# Altium PCB smartee.PcbDoc
Units mil, origin at the board's own origin, x right, y up, seen from the top; angles counter-clockwise.
Board outline 1968.5 x 1181.1 mil, 4 copper layers (Top Layer, Power, GND, Bottom Layer), stack 30.634 mil thick; 55 components, 44 nets, 231 pads, 116 vias.
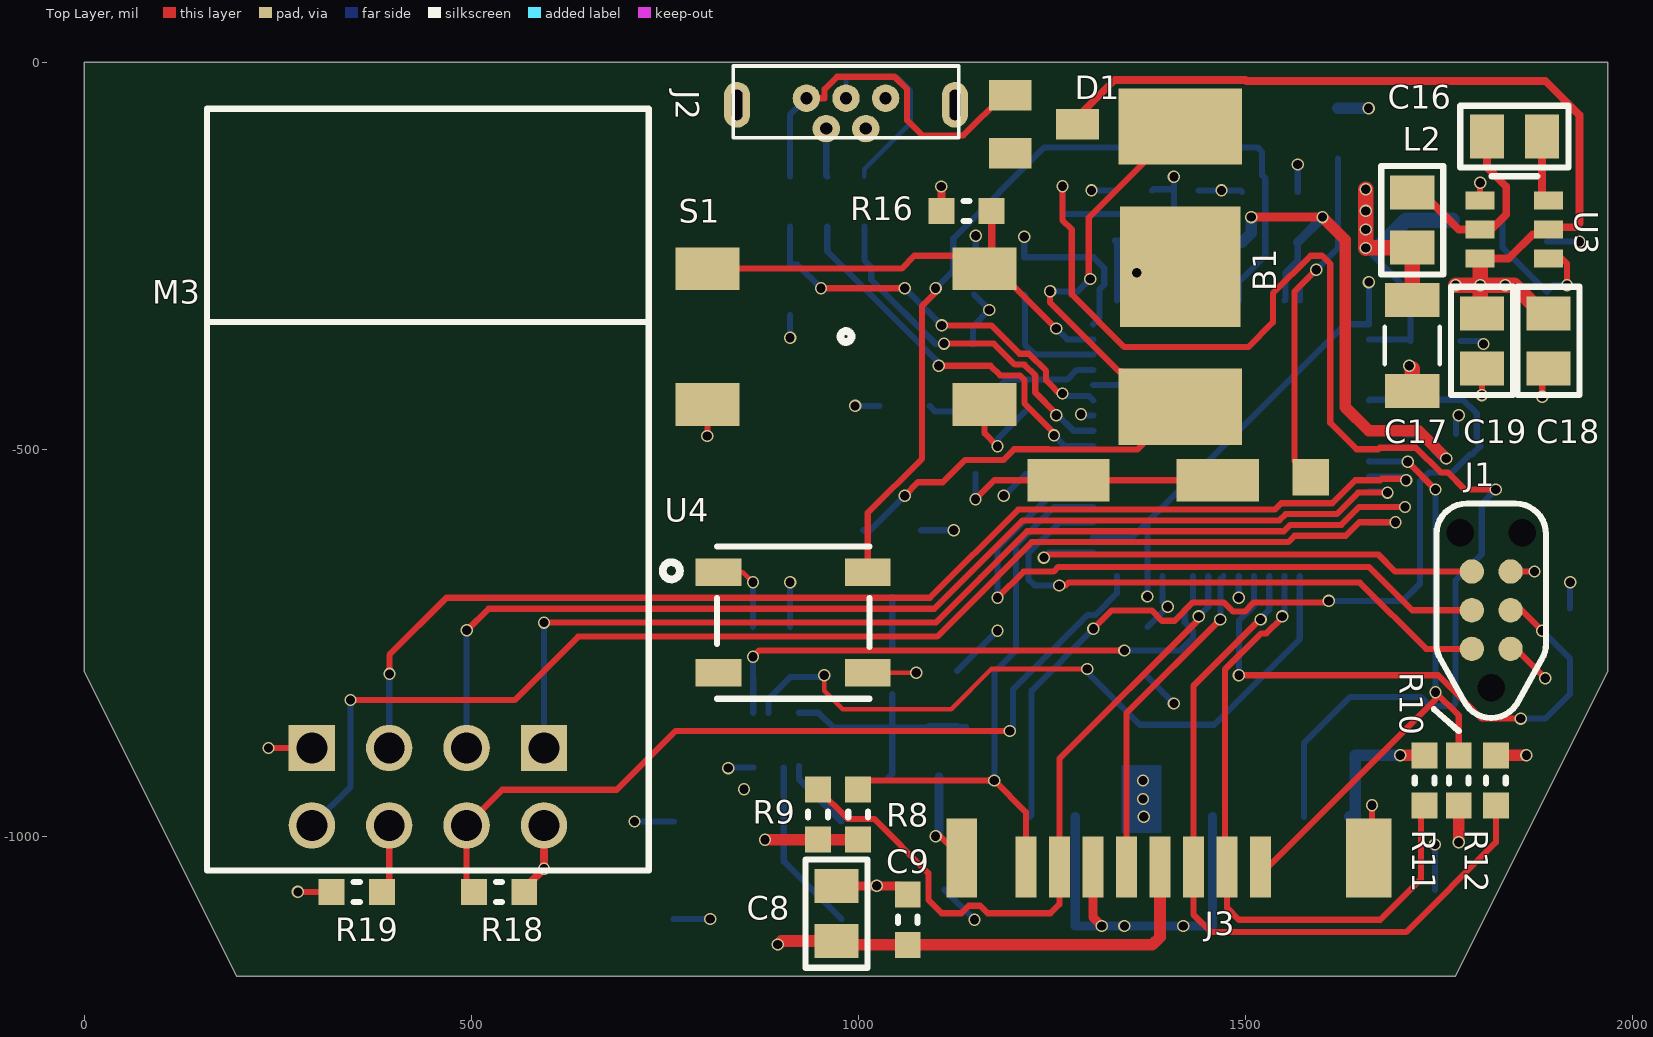
[diagram p0: Top Layer view]
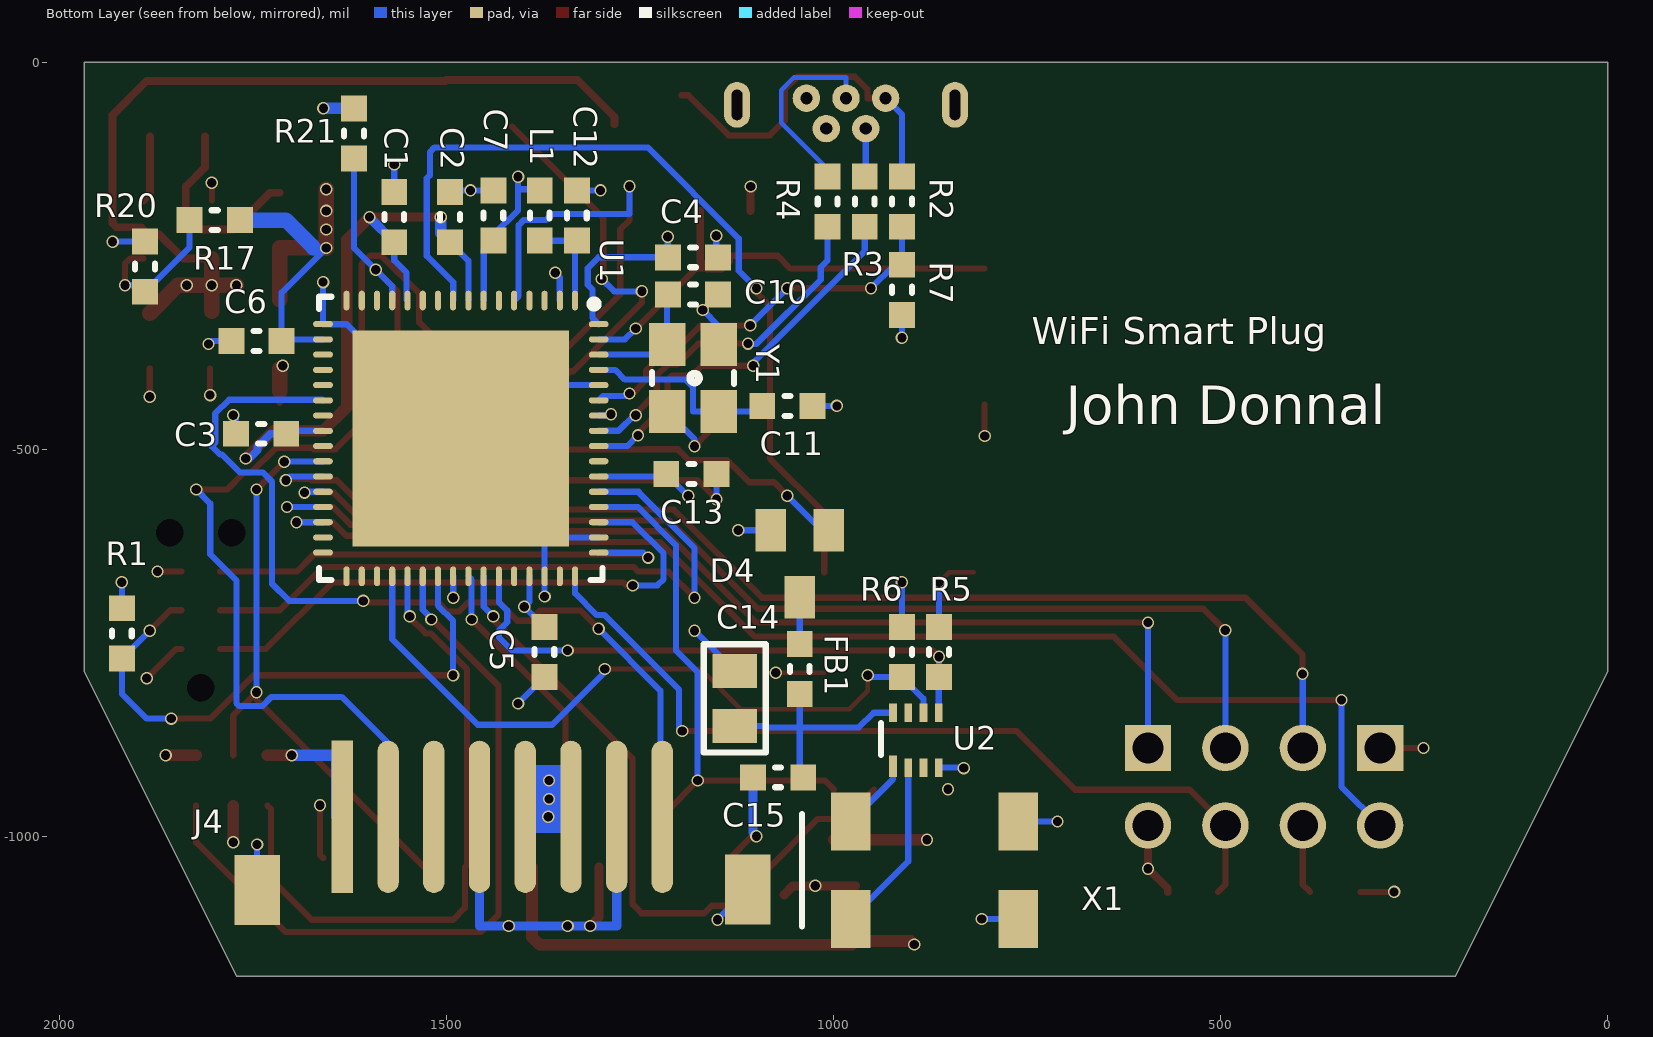
[diagram p1: Bottom Layer view, seen from below]
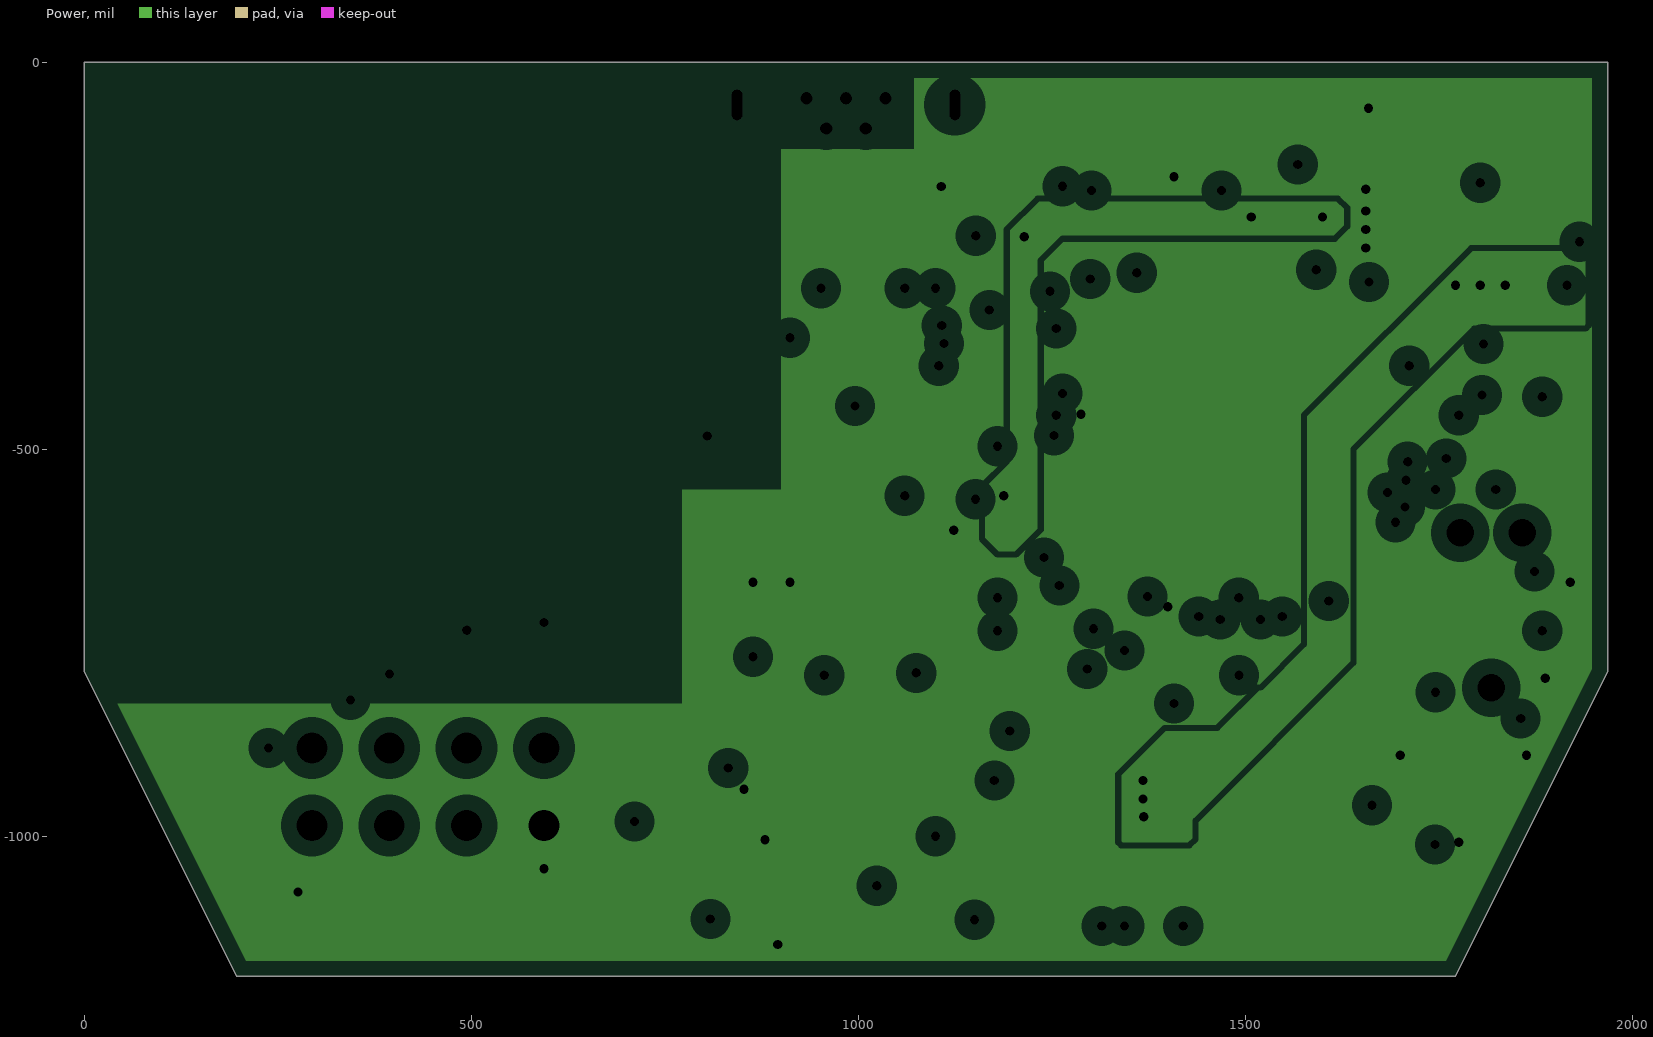
[diagram p2: Power, clearances drawn from the general rule]
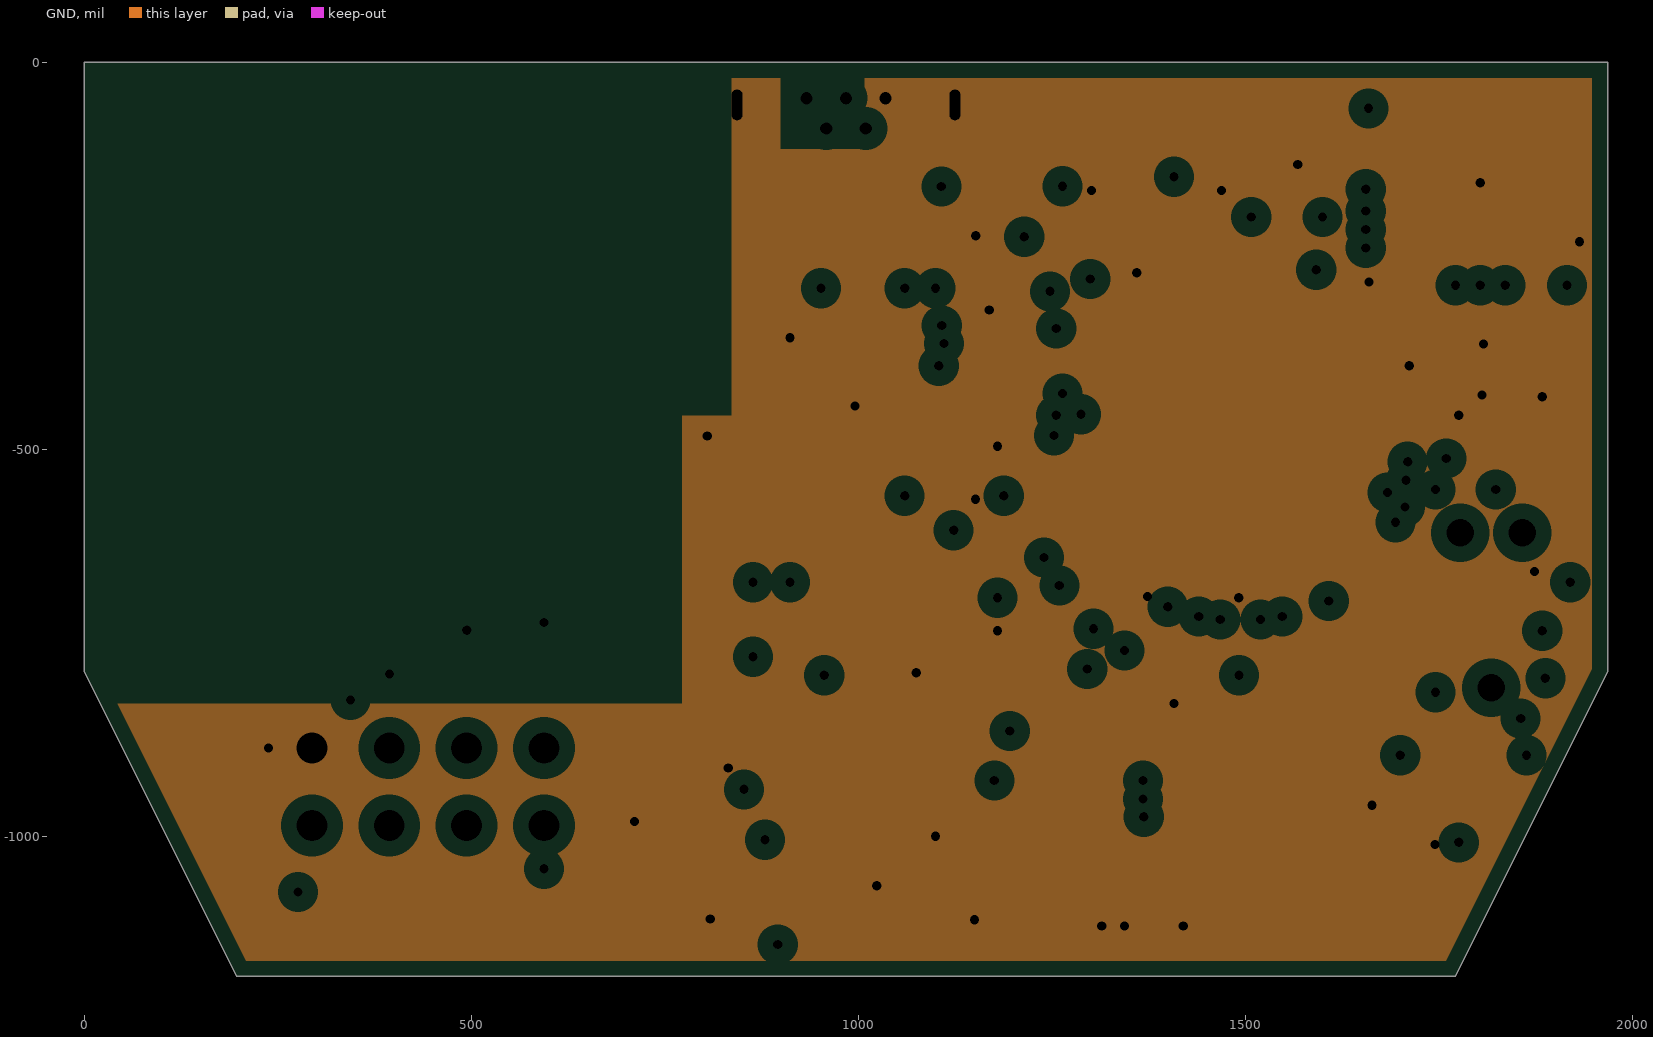
[diagram p3: GND, clearances drawn from the general rule]

## Layer stack, top to bottom
Top Solder: solder mask 0.4, Solder Resist, Dk 3.5
Top Layer: signal copper 1.4
Dielectric 1: core 10, FR-4, Dk 4.2
Power: plane copper 1.417, net (Multiple Nets)
Dielectric 3: prepreg 5, Dk 4.2
GND: plane copper 1.417, net GND
Dielectric 2: core 10, Dk 4.2
Bottom Layer: signal copper 1.4
Bottom Solder: solder mask 0.4, Solder Resist, Dk 3.5

## Board outline
196.85,-1181.1 0,-787.4 0,0 1968.5,0 1968.5,-787.4 1771.65,-1181.1

## Design rules (kind name [scope] priority, off if disabled: settings)
Clearance [All] p1: gap=6
MinimumSolderMaskSliver [All] p1: minsoldermaskwidth=2
PlaneClearance [All] p1: clearance=20
PlaneConnect [All] p1: planeconnectstyle=Direct reliefexpansion=20 reliefentries=4 reliefconductorwidth=10 reliefairgap=10
PolygonConnect [All] p1: connectstyle=Relief reliefconductorwidth=10 reliefentries=4 polygonreliefangle="90 Angle" airgapwidth=10
RoutingVias [All] p1: holewidth=12 width=16 viastyle="Through Hole" minholewidth=12 minwidth=16 maxholewidth=16 maxwidth=20
SilkToSolderMaskClearance [IsPad] p1: minsilkscreentomaskgap=6 clearancetoexposedcopper=TRUE
SolderMaskExpansion isVia [IsVia] p1: expansion=-10
SolderMaskExpansion [All] p2: expansion=2
UnpouredPolygon [All] p1: allowunpoured=FALSE
Width [All] p1: maxlimit=20 minlimit=6 preferedwidth=8 minimp=50.000000 maximp=50.000000 favimp=50.000000
25 further rules are at their usual default settings.

## Classes and differential pairs
component class wemo_board: C1 C2 C3 C4 C5 C6 C7 C8 C9 C10 C11 C12 C13 D1 J1 J2 J3 L1 R1 R2 R3 R4 R5 R6 R7 R8 R9 R10 R11 R12 R16 R21 S1 U1 U4 Y1
component class wemo_board2: B1 BAT1 C14 C15 C16 C17 C18 C19 D4 FB1 J4 L2 M3 R17 R18 R19 R20 U2 U3 X1

## Components (designator, comment, footprint, x,y, rotation, side; value= is the part's Value field where it differs from the comment)
B1 "BK-879" BK-879 1416,-264 r270 top
C1 "0.1u" 0603 1568,-200 r90 bottom
C2 "0.1u" 0603 1496,-200 r90 bottom
C3 "0.1u" 0603 1740,-480 r0 bottom
C4 "0.1u" 0603 1182,-252 r180 bottom
C5 "0.1u" 0603 1374,-762 r270 bottom
C6 "0.1u" 0603 1746,-360 r0 bottom
C7 "0.1u" 0603 1440,-198 r90 bottom
C8 "22u" 0805 972,-1100 r90 top
C9 "0.1u" 0603 1064,-1108 r90 top
C10 "CAP" 0603 1182,-300 r0 bottom
C11 "CAP" 0603 1060,-444 r0 bottom
C12 "CAP" 0603 1332,-198 r90 bottom
C13 "CAP" 0603 1184,-532 r0 bottom
C14 "22u" 0805 1128,-822 r90 bottom
C15 "0.1u" 0603 1072,-924 r0 bottom
C16 "0.1u" 0805 1848,-96 r180 top
C17 "22u" 1206 1716,-366 r270 top
C18 "10u" 0805 1892,-360 r270 top
C19 "10u" 0805 1806,-360 r270 top
D1 "BAT54C" SOT23 1240,-80 r270 top
D4 "BAT54C" SOT23 1044,-648 r0 bottom
FB1 "100 @ 100 MHz" 0603 1044,-784 r270 bottom
J1 "TC2030-MCP-NL" TC2030-MCP-NL 1818,-708 r90 top
J2 "614105150621" 614105150621 984.25,-66 r0 top
J3 "DM3CS-SF" DM3CS-SF 1390,-1040 r0 top
J4 "B8B-ZR-SM4-TF(LF)(SN)" B8B-ZR-SM4-TF 1635,-975 r0 bottom
L1 "Ferrite" 0603 1380,-198 r270 bottom
L2 "3.3u" 0805 1716,-204 r270 top
M3 "ESP8266" ESP8266 444,-936 r90 top
R1 "RES" 0603 1920,-738 r270 bottom
R2 "RES" 0603 912,-180 r90 bottom
R3 "RES" 0603 960,-180 r90 bottom
R4 "RES" 0603 1008,-180 r90 bottom
R5 "RES" 0603 864,-762 r270 bottom
R6 "RES" 0603 912,-762 r270 bottom
R7 "RES" 0603 912,-294 r90 bottom
R8 "RES" 0603 1000,-972 r270 top
R9 "RES" 0603 948,-972 r270 top
R10 "RES" 0603 1732,-928 r90 top
R11 "RES" 0603 1776,-928 r270 top
R12 "RES" 0603 1824,-928 r90 top
R16 "RES" 0603 1140,-192 r180 top
R17 "RES" 0603 1800,-204 r0 bottom
R18 "RES" 0603 536,-1072 r180 top
R19 "RES" 0603 352,-1072 r0 top
R20 "RES" 0603 1890,-264 r90 bottom
R21 "RES" 0603 1620,-92 r90 bottom
S1 "2-1437565-9" 2-1437565-9 984.25,-354.33 r270 top
U1 "SAM4S" QFN64 1482,-486 r270 bottom
U2 "ISL12057IRUZ-T" UTDFN8 894,-876 r90 bottom
U3 "TPS562209DDCT" TSOP-6 1848,-216 r0 top
U4 "28085" WS2812B 916,-724 r0 top
X1 "CPFBZ-A2C4-32.768KD6" XTAL 870,-1044 r180 bottom
Y1 "XTAL" XTAL_3.2X2.5MM 1182,-408 r270 bottom

## Footprints (in the part's own frame and the unit in brackets; to place one, negate y for a bottom-side part, rotate by r counter-clockwise, add the part's x,y. Pads: shape width x height; smd on the part's side, far side on the other; paste and mask are expansions set on the pad)
2-1437565-9 [mm] "Push Button"
  rect 1.4x2.1 smd: 1(-2.23,4.55) 2(-2.23,-4.55) 3(2.23,4.55) 4(2.23,-4.55)
  body extent -3,-5 3,5, height 4.41
0603 [mm]
  rect 0.85x0.85 smd: 1(-0.825,0) 2(0.825,0)
  silkscreen extent -0.1,-0.33 0.1,0.33, body extent -0.8,-0.4 0.8,0.4, height 0.8
0805 [mil]
  rect 44x57 smd: 1(-35.5,0) 2(35.5,0)
  silkscreen extent -70,-40 70,40, body extent -39,-25 39,25, height 49
1206 [mil]
  rect 44x71 smd: 1(-59,0) 2(59,0)
  silkscreen extent -24,-36 24,36, body extent -63,-31 63,31, height 63
614105150621 [mm] "WR-COM_USB_Micro Type AB_Vertical_THT Micro Type AB Vertical THT"
  round 0.9 hole 0.4: 1(-1.3,0.5) 2(-0.65,-0.5) 3(0,0.5) 4(0.65,-0.5) 5(1.3,0.5)
  oval 0.85x1.5 hole 0.35 slot 1 at 90 deg: Z1(-3.575,0.28) Z2(3.575,0.28)
  silkscreen extent -3.7,-0.8 3.7,1.55, body extent -3.99,-1.07 4.01,1.83, height 5.6
B8B-ZR-SM4-TF [mm]
  oval 0.7x5 smd: 1(-10.5,0) 2(-9,0) 3(-7.5,0) 4(-6,0) 5(-4.5,0) 6(-3,0) 7(-1.5,0)
  rect 0.7x5 smd: 8(0,0)
  rect 1.5x2.3 smd: S1(-13.3,2.388) S2(2.8,2.4)
  body extent -12.76,-1.21 2.24,3.99, height 5
BK-879 [mm] "Coin Cell Holder"
  rect 3.96x3.96 smd: N(0,0)
  rect 2.5x4.06 smd: P1(-4.6,0) P2(4.6,0)
  body extent -5.26,-4.04 5.41,3.84, height 2.79
DM3CS-SF [mm] "uSD Card Holder"
  rect 0.7x2 smd: 1(3.3,0) 2(2.2,0) 3(1.1,0) 4(0,0) 5(-1.1,0) 6(-2.2,0) 7(-3.3,0) 8(-4.4,0)
  rect 1x2.6 smd: 9(-6.5,0.3)
  rect 1.5x2.6 smd: 10(6.85,0.3)
  rect 2.7x1.4 smd: 11(-3,12.7) 12(1.9,12.7)
  rect 1.2x1.2 smd: 13(4.95,12.8)
  body extent -6.6,-0.79 7.2,13.31, height 1.98
ESP8266 [mil]
  rect 60x60 hole 40: 1(50,150) 4(50,-150)
  round 60 hole 40: 2(50,50) 3(50,-50) 5(-50,150) 6(-50,50) 7(-50,-50) 8(-50,-150)
  silkscreen extent -108,-285 876,285, body extent -109,-285 876,285, height 157
QFN64 [mm] "QFN, 64-Leads, Body 9.00x9.00mm, Pitch 0.50mm, Thermal Pad 7.10x7.10mm, IPC Medium Density"
  oval 0.65x0.2 smd: 1(-4.525,3.75) 2(-4.525,3.25) 3(-4.525,2.75) 4(-4.525,2.25) 5(-4.525,1.75) 6(-4.525,1.25) 7(-4.525,0.75) 8(-4.525,0.25) 9(-4.525,-0.25) 10(-4.525,-0.75) 11(-4.525,-1.25) 12(-4.525,-1.75) 13(-4.525,-2.25) 14(-4.525,-2.75) 15(-4.525,-3.25) 16(-4.525,-3.75) 33(4.525,-3.75) 34(4.525,-3.25) 35(4.525,-2.75) 36(4.525,-2.25) 37(4.525,-1.75) 38(4.525,-1.25) 39(4.525,-0.75) 40(4.525,-0.25) 41(4.525,0.25) 42(4.525,0.75) 43(4.525,1.25) 44(4.525,1.75) 45(4.525,2.25) 46(4.525,2.75) 47(4.525,3.25) 48(4.525,3.75)
  oval 0.2x0.65 smd: 17(-3.75,-4.525) 18(-3.25,-4.525) 19(-2.75,-4.525) 20(-2.25,-4.525) 21(-1.75,-4.525) 22(-1.25,-4.525) 23(-0.75,-4.525) 24(-0.25,-4.525) 25(0.25,-4.525) 26(0.75,-4.525) 27(1.25,-4.525) 28(1.75,-4.525) 29(2.25,-4.525) 30(2.75,-4.525) 31(3.25,-4.525) 32(3.75,-4.525) 49(3.75,4.525) 50(3.25,4.525) 51(2.75,4.525) 52(2.25,4.525) 53(1.75,4.525) 54(1.25,4.525) 55(0.75,4.525) 56(0.25,4.525) 57(-0.25,4.525) 58(-0.75,4.525) 59(-1.25,4.525) 60(-1.75,4.525) 61(-2.25,4.525) 62(-2.75,4.525) 63(-3.25,4.525) 64(-3.75,4.525)
  rect 7.1x7.1 smd: 65(0,0)
  silkscreen extent -4.65,-4.65 4.65,4.65, body extent -4.5,-4.5 4.5,4.5, height 0.9
SOT23 [mm] "SOT23"
  rect 1x1.4 smd: 1(-0.95,-1.1) 2(0.95,-1.1) 3(0,1.1)
  body extent -1.46,-0.65 1.46,0.65, height 1.2
TC2030-MCP-NL [mm] "Conector ICD en placa"
  round 0.8 smd paste-0.4: 1(-1.27,-0.635) 2(-1.27,0.635) 3(0,-0.635) 4(0,0.635) 5(1.27,-0.635) 6(1.27,0.635)
  round 0.85 hole 0.9 unplated mask+0: ""(-2.54,0) ""(2.54,-1.016) ""(2.54,1.016)
  silkscreen extent -3.54,-1.8 3.5,1.8, body extent -3.55,-1.81 3.51,1.81
TSOP-6 [mm]
  rect 0.95x0.6 smd: 1(-1.125,0.95) 2(-1.125,0) 3(-1.125,-0.95) 4(1.125,-0.95) 5(1.125,0) 6(1.125,0.95)
  silkscreen extent -0.75,1.75 0.75,1.75, body extent -1.42,-1.5 1.45,1.47, height 0.87
UTDFN8 [mm]
  rect 0.7x0.25 smd: 1(-0.85,0.75)
  rect 0.6x0.25 smd: 2(-0.9,0.25) 3(-0.9,-0.25) 4(-0.9,-0.75) 5(0.9,-0.75) 6(0.9,-0.25) 7(0.9,0.25) 8(0.9,0.75)
  silkscreen extent -0.48,1.14 0.56,1.14, body extent -1,-1 1,1, height 0.55
WS2812B [mm]
  rect 1.5x0.9 smd: 1(-2.45,1.65) 2(-2.45,-1.65) 3(2.45,-1.65) 4(2.45,1.65)
  silkscreen extent -4.28,-2.5 2.5,2.5, body extent -2.5,-2.5 2.5,2.5, height 2.6
XTAL [mm] "32.768kHz"
  rect 1.3x1.9 smd: 1(-2.75,-1.6) 2(2.75,-1.6) 3(2.75,1.6) 4(-2.75,1.6)
  silkscreen extent -4.35,-1.85 -4.35,1.85, body extent -4.35,-1.85 4.35,1.85, height 2.5
XTAL_3.2X2.5MM [mm]
  rect 1.4x1.2 smd: 1(-1.1,-0.85) 2(1.1,-0.85) 3(1.1,0.85) 4(-1.1,0.85)
  silkscreen extent -0.2,-1.35 0.2,1.35

## Part data
B1: "HOLDER 6.8MM COIN CELL SMD"
C1 C2 C3 C4 C5 C6 C7 C9 C15: library part CC0603ZRY5V9BB104, "CAP CER 0.1UF 50V Y5V 0603"
C8 C14: library part CL21A226MAQNNNE, "CAP CER 22UF 25V 20% X5R 0805"
C10 C11 C12 C13: "Capacitor"
C16: library part 08053C104KAT2A, "CAP CER 0.1UF 25V 10% X7R 0805"
C17: library part C3216X5R0J226K/1.6, "CAP CER 22UF 6.3V 10% X5R 1206"
C18 C19: library part C0805C106K8PACTU, "CAP CER 10UF 10V 10% X5R 0805"
D1 D4: "DIODE SCHOTTKY 30V 200MA SOT23"
FB1: library part MPZ1608S101ATAH0, "FERRITE CHIP 100 OHM 3A 0603"
J1: "Tag Connect"
J2: "CONN RCPT USB TYPE AB"
J3: "CONN MICRO SD R/A HING TYPE SMD"
J4: "CONN HEADER ZH TOP 8POS 1.5MM"
L1: "Ferrite bead"
L2: library part MLP2012S3R3MT0S1, "FIXED IND 3.3UH 900MA 190 MOHM"
M3: "WiFi UART module"
R1 R2 R3 R4 R5 R6 R7 R8 R9 R10 R11 R12 R16 R17 R18 R19 R20 R21: "Resistor"
S1: "SWITCH TACTILE SPST-NO 0.05A 12V"
U1: "Atmel SAM4S microcontroller, 64 pin"
U2: "IC RTC CLK/CALENDAR I2C 8-UTDFN"
U3: "IC REG BUCK SYNC ADJ 2A SOT-23-6"
U4: "WS2812 LED MODULE"
X1: "CRYSTAL 32.768KHZ 6PF SMD"
Y1: "Crystal Oscillator"

## Via types
v1: diameter 16, hole 12, Top Layer to Bottom Layer, 116 vias

## Nets (pads, with @x,y where several pads share a name; then routed paths per layer and width w, separated by ;. In a path a pad name is that pad's centre, name@x,y a point inside that pad or via, vN(x,y) a via of type N, cw(c..) or ccw(c..) an arc to the next point about the centre after c; other vN are vias at no path point)
+1V2: C1.1 C2.1 C3.1 C4.1 C13.2 U1.8 U1.12 U1.24 U1.54 U1.64 | length 1222.9
  Top Layer w8: v1@1503.95,-199.95 1504,-200 v1(1508,-200) ; v1(1600,-200) v1(1600,-200)
  Top Layer w12: v1(1508,-200) v1(1600,-200)
  Top Layer w15: v1(1600,-200) 1629.5,-229.5 1629.5,-445.5 1660,-476 1724,-476 v1(1760,-512)
  Bottom Layer w8: v1(1188,-560) 1188.48,-560 C13.2 1219.69,-535.21 U1.54 ; v1(1214.48,-225.52) C4.1 1304,-252 1318,-266 1318,-287.46 1312,-293.46 1312,-330.21 U1.64 ; U1.8 1472.16,-256.32 C2.1 ; U1.12 1552,-306.75 1552,-272 1568,-256 C1.1 ; v1@1600,-200.48 v1(1600,-200) ; U1.24 C3.1@1703.68,-476.16
  Bottom Layer w10: C3.1@1703.68,-476.16 C3.1 1728,-480 1744.75,-496.75 1744.75,-501.29 1755.46,-512 v1(1760,-512)
  Bottom Layer w12: C1.1 v1@1600,-200.48
  Bottom Layer w15: C2.1 1508,-220.48 v1(1508,-200)
+3V3: C5.1 C6.1 C7.1 C8.1 C9.1 C17.1 D4.2 J1.1 J3.4 J4.8 L1.1 L2.2 M3.8 R1.1 R5.1 R6.1 R8.2 R9.2 R10.2 R11.2 R12.2 R16.2 R17.1 R18.1 R19.1 R21.2 U1.7 U1.18 U1.45 U1.58 U4.1 | length 2311.4
  Top Layer w6: U4.1 851.04,-659.04 v1(864,-672)
  Top Layer w8: v1(276,-1072) R19.1 ; J1.1 1850,-758 v1(1888,-796)
  Top Layer w10: R18.1 568.48,-1067.52 v1(594,-1042) M3.8 ; R16.2 v1(1107.52,-160.48) ; 1390,-1130.48 1391.52,-1132
  Top Layer w15: v1(879.52,-1004.48) R9.2 R8.2 ; v1(896,-1140) 900.5,-1135.5 C8.1 976.98,-1140.48 C9.1 1380,-1140.48 1390,-1130.48 J3.4 ; v1(1700.48,-895.52) R10.2 ; v1(1776,-1008) R11.2 ; R12.2 v1(1863.52,-895.52)
  Top Layer w20: v1(1656,-240) v1@1656,-239.5 ; v1(1656,-164) v1(1656,-216) v1@1656,-239.5 ; C17.1 L2.2 v1@1656,-239.5
  Bottom Layer w8: R5.1 v1(864,-672) ; R6.1 v1(912,-672) ; D4.2 v1(1123.31,-604.69) ; v1(1287.91,-454.72) 1286.22,-454.72 1284.47,-456.47 U1.58 ; C5.1 v1(1400,-703.52) 1393.42,-696.94 U1.45 ; L1.1 1381.52,-164 1408,-164 ; v1(1408,-148) 1408,-164 ; U1.7 1452.47,-242.95 C7.1 1440,-223.07 1408,-191.07 1408,-164 ; v1(1656,-240) 1713.52,-297.52 C6.1 1711.57,-358.05 U1.18 ; R1.1 v1(1920,-672)
  Bottom Layer w15: R21.2 v1(1659.52,-59.52) ; J4.8 1642.5,-975 1642.5,-895.52 v1(1700.48,-895.52)
  Bottom Layer w20: 1672.5,-239.5 1708,-204 R17.1
  other v1: 852.48,-939.52 1656,-192
+5V: C18.1 C19.1 D1.3 J4.3 J4.4 U3.3 U3.5 | length 1183
  Top Layer w10: D1.3 1283.31,-70.9 1331.52,-22.68 1500.48,-22.68 1501.79,-24 1888,-24 1932,-68 1932,-208 1927,-213 1895.29,-213 U3.5 1886.29,-222 1871.97,-222 1840.57,-253.4 U3.3 U3.3@1804,-253.69 ; C19.1@1804,-321.92 1803.71,-322.21 C19.1
  Top Layer w20: v1(1772,-288) v1(1804,-288) ; C19.1@1804,-321.92 v1(1804,-288) ; U3.3@1804,-253.69 v1(1804,-288) ; C18.1@1884,-324.5 1847.5,-288 v1(1836,-288) v1(1804,-288)
  other v1: 1369,-975 1368,-952 1368,-928
BTN: R16.1 S1.1 S1.2 U1.63 | length 634.8
  Top Layer w8: S1.2 1056.01,-266.54 1072.54,-250 1134,-250 1134,-256.98 1144.54,-267.52 1159.46,-267.52 1161.91,-265.06 S1.1 1178.54,-266.54 v1(1256,-344)
  Top Layer w10: S1.1 1172.48,-257.44 R16.1
  Bottom Layer w8: v1(1256,-344) 1270.05,-358.05 U1.63
CD: J3.13 R21.1 U1.13 | length 492.2
  Top Layer w8: J3.13 1564,-515.18 1564,-296 v1(1592,-268)
  Bottom Layer w8: U1.13 1570.58,-289.42 v1(1592,-268) 1620,-240 R21.1
GND: B1.N C1.2 C2.2 C3.2 C4.2 C5.2 C6.2 C7.2 C8.2 C9.2 C10.1 C11.1 C12.2 C13.1 C14.2 C15.2 C17.2 C18.2 C19.2 J1.5 J2.5 J2.Z1 J2.Z2 J3.6 J3.9 J3.10 J3.11 J3.12 J4.2 J4.5 J4.S1 J4.S2 M3.1 R7.1 R20.2 S1.3 S1.4 U1.2 U1.17 U1.40 U1.46 U1.50 U1.60 U1.65 U2.4 U3.1 U4.3 X1.2 X1.3 Y1.2 Y1.4 | length 3293.2
  Top Layer w6: U4.3 v1(1075.04,-788.96)
  Top Layer w8: v1(238,-886) M3.1 ; v1(805.12,-482.88) S1.4 ; v1(1100,-1000) 1105.91,-1000 J3.9 ; v1(1151.52,-564.48) 1176,-540 J3.11 J3.12 ; S1.3 1163.39,-479.39 v1(1180,-496) ; J3.10 1664,-1023.88 v1(1664,-960) ; v1(1712,-392) v1@1716,-396 ; C17.2@1716,-440 C17.2 ; U3.1 v1(1803.71,-155.71) ; v1(1806,-430) C19.2 ; J1.5 v1(1874,-658) ; v1(1884,-432) C18.2@1884,-395.5
  Top Layer w12: C8.2 1052.98,-1064.5 C9.2 ; J3.6 1303.39,-1104.61 v1(1314.77,-1116)
  Top Layer w20: C17.2 v1@1716,-396
  Bottom Layer w8: v1(710.99,-981.01) X1.3 ; X1.2 v1(809.01,-1106.99) ; v1(832,-912) 832.57,-911.43 U2.4 ; v1(912,-356) R7.1 ; v1(996,-444) C11.1 ; J4.S1 v1(1150.38,-1108) ; C14.2 v1(1180,-734.5) ; Y1.4 1148.54,-340.98 v1(1169.52,-320) C10.1 ; C4.2 1152,-249.52 v1(1152,-224) ; v1(1151.52,-564.48) C13.1 ; v1(1180,-496) 1180,-486.77 Y1.2 ; v1(1301.52,-165.52) C12.2 ; U1.50 1354.05,-613.95 U1.65@1373.73,-594.27 ; U1.60 1413.1,-417.1 U1.65 ; U1.2 1354.05,-277.95 v1(1360,-272) ; v1(1373.73,-690.27) U1.46 U1.65@1373.73,-594.27 ; C5.2 v1(1408,-828.48) ; C7.2 v1(1469.52,-165.52) 1494,-165.52 C2.2 ; v1(1491.84,-691.84) U1.40 ; C1.2 v1(1568,-132) ; v1(1660,-284) 1660.15,-284.15 U1.17 1629.64,-338.36 U1.65 ; J4.S2 v1(1745.24,-1010.76) ; C3.2 1772.48,-459.52 v1(1776,-456) ; C6.2 1804,-360 v1(1808,-364) ; R20.2 1931.52,-231.52 v1(1932,-232) ; U1.65@1373.73,-594.27 U1.65
  Bottom Layer w12: v1(1100,-1000) 1104.48,-995.52 C15.2 ; J4.2 1280.67,-1116 v1(1314.77,-1116) 1457.84,-1116 J4.5
  other v1: 1344,-1116 1420,-1116 1024,-1064
LED_DATA: U1.9 U4.4 | length 1135.1
  Top Layer w8: U4.4 1012.46,-582.09 1082.48,-512.06 1082.48,-314.77 1100,-297.25 v1(1100,-292)
  Bottom Layer w8: v1(1100,-292) 1122.79,-269.21 1122.79,-227.76 1240.54,-110 1516,-110 1522,-116 1522,-145.91 1526,-149.91 1526,-250.09 1491.84,-284.24 U1.9
MCCDA: J3.3 R12.1 U1.38 | length 974.1
  Top Layer w8: v1(1520,-720) 1518.75,-720 1433.31,-805.44 J3.3 1433.31,-1101.31 1456,-1124 1708,-1124 1824,-1008 R12.1
  Bottom Layer w8: v1(1520,-720) 1520,-718.54 1531.21,-707.33 U1.38
MCCK: J3.5 U1.41 | length 427.8
  Top Layer w8: J3.5 1346.69,-841.31 v1(1468,-720)
  Bottom Layer w8: v1(1468,-720) 1468,-668.31 U1.41
MCDA0: J3.7 R9.1 U1.42 | length 914.8
  Top Layer w8: R9.1 986.23,-977.75 1020.87,-977.75 1090.73,-1047.61 1090.73,-1082.25 1108,-1099.52 1133.4,-1099.52 1142.92,-1090 1157.83,-1090 1167.35,-1099.52 1248.48,-1099.52 1260.08,-1087.92 J3.7 1260.08,-899.92 1440,-720 v1(1440,-716)
  Bottom Layer w8: v1(1440,-716) 1452.47,-703.53 U1.42
MCDA1: J3.8 R8.1 U1.52 | length 745.6
  Top Layer w8: R8.1 1011.52,-928 v1(1176,-928) 1216.77,-968.77 J3.8
  Bottom Layer w8: v1(1176,-928) 1176,-788 1204,-760 1204,-624 1253.42,-574.58 U1.52
MCDA2: J3.1 R11.1 U1.26 | length 782.2
  Top Layer w8: J3.1 1529.46,-1040 1746,-823.46 v1(1746,-813.92) 1776,-843.92 R11.1 ; v1(1710,-516) v1(1746,-552)
  Bottom Layer w8: U1.26 1660.62,-516 v1(1710,-516) ; v1(1746,-813.92) v1(1746,-552)
MCDA3: J3.2 R10.1 U1.37 | length 841.2
  Top Layer w8: v1(1548,-716) 1548,-717.46 1527.46,-738 1520.54,-738 1474,-784.54 1474,-1037.39 J3.2 1476.61,-1092.61 1492,-1108 1674.73,-1108 1727.24,-1055.49 1727.24,-965.24 R10.1
  Bottom Layer w8: v1(1548,-716) 1550.9,-713.1 U1.37
NetB1_P1: B1.P1 B1.P2 D4.1 | length 1010.6
  Top Layer w8: v1(1060,-560) 1077.27,-542.73 1109.21,-542.73 1137.94,-514 1187.46,-514 1201.46,-500 1245.5,-500 1245.63,-500.13 1360.97,-500.13 B1.P2@1401.1,-460 ; v1(1248,-296) 1248,-310.54 1336.73,-399.27 1340.37,-399.27 B1.P2@1401.1,-460 ; v1(1300,-280) 1298,-278 1298,-200.9 B1.P1 ; B1.P2 B1.P2@1401.1,-460
  Bottom Layer w8: D4.1 1015.31,-604.69 v1(1060,-560) ; v1(1248,-296) 1284,-296 v1(1300,-280)
NetC12_1: C12.1 L1.2 U1.1 | length 126.3
  Bottom Layer w8: U1.1 1334.36,-232.84 C12.1 L1.2
NetC14_1: C14.1 C15.1 FB1.2 U2.8 | length 339.5
  Bottom Layer w8: U2.8 948.57,-840.57 967.5,-859.5 1044,-859.5 ; C15.1 1044,-919.52 1044,-859.5 ; FB1.2 1044,-859.5 ; C14.1@1122,-859 C14.1@1139,-859 ; C14.1 1091.5,-857.5 1089.5,-859.5 1044,-859.5
NetC16_1: C16.1 U3.6 | length 86.2
  Top Layer w10: C16.1 1883.5,-169.81 U3.6
NetC16_2: C16.2 L2.1 U3.2 | length 260.1
  Top Layer w10: L2.1 1728.5,-168.5 1776,-216 U3.2 1818.03,-216 1837.41,-196.62 1837.41,-160.57 1812.5,-135.66 C16.2
NetD1_1: D1.1 J2.1 R2.2 | length 468.3
  Top Layer w8: J2.1 956.54,-46.31 956.54,-34.83 972.77,-18.6 1046.91,-18.6 1063.15,-34.83 1063.15,-75.15 1082.5,-94.5 1136.07,-94.5 1187.98,-42.6 D1.1
  Bottom Layer w8: R2.2 912,-67.39 J2.1
NetD4_3: D4.3 FB1.1 | length 66.2
  Bottom Layer w8: FB1.1@1044,-757.5 D4.3
NetJ2_2: J2.2 R3.2 | length 62.4
  Bottom Layer w8: J2.2 958.66,-146.18 R3.2
NetJ2_3: J2.3 R4.2 | length 253.6
  Bottom Layer w6: J2.3 984.25,-19.6 1051.6,-19.6 1068,-36 1068,-78 1008,-138 R4.2
NetJ4_1: J4.1 U1.22 | length 1168
  Top Layer w8: v1(1304,-732) 1327.73,-708.27 1379.29,-708.27 1392.54,-721.52 1409.02,-721.52 1432.54,-698 1472.54,-698 1484.39,-709.84 1499.3,-709.84 1511.14,-698 1610,-698 v1(1608,-696)
  Bottom Layer w8: J4.1 1224,-972.62 1224,-812 v1(1304,-732) ; v1(1608,-696) 1704,-696 1726,-674 1726,-542 1738,-530 1767.46,-530 1790.72,-506.73 1793.35,-506.73 1804,-496.09 1799.21,-491.3 1799.21,-453.76 1781.46,-436 1660.94,-436 U1.22
NetJ4_7: J4.7 U1.5 | length 1944.3
  Top Layer w8: v1(1264,-160) 1264,-204 1276,-216 1276,-300 1344,-368 1504,-368 1536,-336 1536,-298.54 1584.54,-250 1599.46,-250 1610,-260.54 1610,-466 1644,-500 1672,-500 1674,-498 1720.54,-498 1752.54,-530 1762,-530 1784,-552 v1(1824,-552)
  Bottom Layer w8: v1(1264,-160) 1264,-196 1364,-196 1371.75,-203.75 1400.87,-203.75 1407.35,-210.23 1407.35,-302.1 U1.5 ; J4.7 1575.95,-880.05 1636,-820 1726.62,-820 1738.54,-831.92 1768.08,-831.92 1772,-828 1772,-669.43 1805.72,-635.72 1805.72,-570.28 v1(1824,-552)
NetM3_2: M3.2 U1.27 | length 1582.5
  Top Layer w8: v1(394.3,-790.3) 394.3,-765.7 468,-692 1092.6,-692 1206.6,-578 1538.29,-578 1546.6,-569.69 1612.65,-569.69 1642.33,-540 1674.54,-540 1676.54,-538 1706,-538 v1(1708,-540)
  Bottom Layer w8: M3.2 v1@394,-790 ; v1(394.3,-790.3) v1@394,-790 ; v1@396,-788 v1@394,-790 ; U1.27 1703.21,-535.21 v1(1708,-540)
NetM3_3: M3.3 U1.28 | length 1442.7
  Top Layer w8: v1@494.2,-734.2 522.4,-706 1098.4,-706 1212.4,-592 1544.09,-592 1552.4,-583.69 1618.45,-583.69 1646.13,-556 v1(1684,-556)
  Bottom Layer w8: M3.3 v1(494,-734) v1@496,-732 ; U1.28 1682.9,-554.9 v1(1684,-556)
NetM3_4: M3.4 U1.29 | length 1382.9
  Top Layer w8: v1(594,-724) 1100.2,-724 1158.1,-666.1 1218.2,-606 1549.89,-606 1558.2,-597.69 1624.24,-597.69 1647.35,-574.58 v1(1706.58,-574.58)
  Bottom Layer w8: M3.4 v1(594,-724) ; U1.29 v1(1706.58,-574.58)
NetM3_5: M3.5 U1.30 | length 1662.3
  Top Layer w8: v1(344,-824) 432.2,-824 432.3,-824.1 555.9,-824.1 638,-742 1102,-742 1224,-620 1555.69,-620 1564,-611.69 1630.04,-611.69 1647.46,-594.27 v1(1694.27,-594.27)
  Bottom Layer w8: M3.5 344,-936 v1(344,-824) ; U1.30 v1(1694.27,-594.27)
NetM3_6: M3.6 R19.2 | length 89.9
  Top Layer w8: R19.2 394,-1062.48 M3.6
NetM3_7: M3.7 R18.2 U1.48 | length 1107.9
  Top Layer w8: R18.2 494,-1062.48 M3.7 540,-940 688,-940 764,-864 v1(1196,-864)
  Bottom Layer w8: v1(1196,-864) 1200,-864 1200,-810.54 1296.54,-714 1306.72,-714 1334.36,-686.36 U1.48
NetR5_2: R5.2 U1.43 U2.5 | length 739.8
  Top Layer w8: v1(864,-768) 872,-760 1240,-760 v1(1344,-760)
  Bottom Layer w8: v1(864,-768) R5.2 864.47,-794.95 U2.5 ; v1(1344,-760) 1416,-760 1432.79,-743.21 1432.79,-734.24 1422,-723.46 1422,-708.54 1432.79,-697.76 U1.43
NetR6_2: R6.2 U1.36 U2.6 | length 927.9
  Top Layer w6: v1(956,-792) 956,-812 980,-836 1120,-836 1172,-784 v1(1296,-784)
  Bottom Layer w8: U2.6 884.16,-822.32 R6.2 953.52,-794.48 v1(956,-792) ; v1(1296,-784) 1296,-788 1364,-856 1460,-856 1570.58,-745.42 U1.36
NetR17_2: R17.2 R20.1 U3.4 | length 200.3
  Top Layer w8: U3.4 1909.4,-253.4 1916,-260 v1(1916,-288)
  Bottom Layer w8: R17.2 1832.48,-238.96 R20.1 1898.48,-288 v1(1916,-288)
NetU2_1: U2.1 X1.4 | length 94.2
  Bottom Layer w8: U2.1 923.53,-926.27 X1.4
NetU2_2: U2.2 X1.1 | length 226.4
  Bottom Layer w8: U2.2 903.84,-1032.57 X1.1
NRST: J1.3 R1.2 U1.39 | length 748.8
  Top Layer w8: v1(1492,-792) 1749.53,-792 1805.53,-848 v1(1856,-848) ; J1.3 1857.52,-708 v1(1884,-734.48)
  Bottom Layer w8: v1(1492,-792) 1492,-721.46 1511.53,-701.93 U1.39 ; v1(1856,-848) 1888,-848 1920,-816 R1.2 v1(1884,-734.48)
SWCLK: J1.4 U1.53 | length 871.5
  Top Layer w8: v1(1180,-692) 1214,-658 1252.54,-658 1258.54,-652 1660,-652 1716,-708 J1.4
  Bottom Layer w8: v1(1180,-692) 1180,-628 1252.11,-555.89 1252.11,-554.9 U1.53
SWDIO: J1.2 U1.51 | length 739.4
  Top Layer w8: 1268,-676 1271.73,-672.27 1648.27,-672.27 1734,-758 J1.2
  Bottom Layer w8: v1(1260,-676) 1228,-676 1220,-668 1220,-634.54 1260.28,-594.27 U1.51
SWO: J1.6 U1.49 | length 658.3
  Top Layer w8: v1(1240,-640) 1244,-636 1300,-636 ; 1272,-636 1300,-636 ; J1.6 1694,-658 1672,-636 1300,-636
  Bottom Layer w8: v1(1240,-640) 1246.36,-633.64 U1.49
USB+: R4.1 U1.57 | length 454.5
  Top Layer w8: v1(1110.91,-363.46) 1175.46,-363.46 1202.57,-390.57 1214.67,-390.57 1228.72,-404.63 1228.72,-426.65 1256,-453.93 v1(1256,-456)
  Bottom Layer w8: R4.1 1008,-256 1017,-265 1017,-281 1100,-364 1110.37,-364 v1(1110.91,-363.46) ; v1(1256,-456) 1258.07,-456 1278.23,-476.16 U1.57
USB-: R3.1 U1.56 | length 502.8
  Top Layer w8: v1(1104,-392) 1170.91,-392 1183.48,-404.57 1208.87,-404.57 1214.72,-410.42 1214.72,-440.85 v1@1256,-482.13
  Bottom Layer w8: R3.1 960,-244 1010,-294 1104,-388 v1(1104,-392) ; v1(1253.09,-482.13) 1266.8,-495.84 U1.56
VBUS: R2.1 R7.2 U1.59 | length 526.1
  Top Layer w8: v1(952,-292) v1(1060,-292) ; v1(1108,-340) 1172,-340 1208.57,-376.57 1220.46,-376.57 1242.72,-398.83 1242.72,-410.72 1264,-432 v1(1264,-428)
  Bottom Layer w8: R2.1 R7.2 921.52,-261.52 v1(952,-292) ; v1(1060,-292) v1(1108,-340) ; v1(1264,-428) 1267.1,-431.1 1298.17,-431.1 U1.59
XIN: C10.2 U1.62 Y1.1 | length 158.9
  Bottom Layer w8: C10.2 1215.46,-300.98 Y1.1 1228.5,-377.73 U1.62
XOUT: C11.2 U1.61 Y1.3 | length 255.3
  Bottom Layer w8: C11.2 1099.79,-451.31 Y1.3 1181.84,-451.31 1181.84,-419.61 1191.45,-410 1270,-410 1282.58,-397.42 U1.61
pads on no net: D1.2 J1. J2.4 J4.6 U1.3 U1.4 U1.6 U1.10 U1.11 U1.14 U1.15 U1.16 U1.19 U1.20 U1.21 U1.23 U1.25 U1.31 U1.32 U1.33 U1.34 U1.35 U1.44 U1.47 U1.55 U2.3 U2.7 U4.2

## Polygon pours and split planes (outlines as drawn)
+1V2 on Power (split plane): 1627.92,-189.69 1627.92,-210.31 1614.31,-223.92 1264,-223.92 1262.44,-224.23 1261.78,-224.67 1261.12,-225.12 1233.12,-253.12 1232.23,-254.44 1231.92,-256 1231.92,-602.31 1202.31,-631.92 1181.69,-631.92 1164.08,-614.31 1164.08,-549.69 1194.88,-518.88 1195.77,-517.56 1196.08,-516 1196.08,-508 1196.08,-240 1196.08,-217.69 1233.69,-180.08 1618.31,-180.08
+5V on Power (split plane): 1939.92,-249.69 1939.92,-338.31 1938.31,-339.92 1796,-339.92 1794.44,-340.23 1793.12,-341.12 1637.12,-497.12 1636.23,-498.44 1635.92,-500 1635.92,-774.31 1433.12,-977.12 1432.23,-978.44 1431.92,-980 1431.92,-992 1431.92,-1002.31 1426.31,-1007.92 1341.69,-1007.92 1340.08,-1006.31 1340.08,-984 1340.08,-921.69 1397.69,-864.08 1464,-864.08 1465.56,-863.77 1466.88,-862.88 1517.69,-812.08 1520,-812.08 1521.56,-811.77 1522.88,-810.88 1578.88,-754.88 1579.33,-754.22 1579.77,-753.56 1580.08,-752 1580.08,-680 1580.08,-457.69 1793.69,-244.08 1934.31,-244.08
+3V3 on Power (split plane): 1948.41,-782.66 1759.23,-1161.01 209.27,-1161.01 42.77,-828 772,-828 772,-552 900,-552 900,-112 1072,-112 1072,-20.1 1948.41,-20.1
GND on GND (split plane): 1948.41,-782.66 1759.23,-1161.01 209.27,-1161.01 42.77,-828 772,-828 772,-456 836,-456 836,-20.1 900,-20.1 900,-112 1008,-112 1008,-20.1 1948.41,-20.1

## Other copper
Bottom Layer:
  region net +5V: 1392,-996 1392,-908 1340,-908 1340,-996
Power (plane layer: these items are gaps in the copper):
  region: 900,-552 900,-20 756,-20 756,-552
  rectangle: 8,-828 772,-16
  rectangle: 900,-112 1072,-20
  lines w8: 1160,-616 1180,-636 1204,-636 1236,-604 1236,-256 1264,-228 1600,-228 1616,-228 1632,-212 1632,-188 1620,-176 1232,-176 1192,-216 1192,-240 1192,-508 1192,-516 1160,-548 1160,-616 ; 1336,-1008 1340,-1012 1428,-1012 1436,-1004 1436,-992 1436,-980 1640,-776 1640,-500 1796,-344 1940,-344 1944,-340 1944,-248 1936,-240 1792,-240 1576,-456 1576,-680 1576,-752 1520,-808 1516,-808 1464,-860 1396,-860 1336,-920 1336,-984 1336,-1008
GND (plane layer: these items are gaps in the copper):
  region: 836,-456 836,-20 720,-20 720,-456
  rectangle: 20,-828 772,-12
  rectangle: 900,-112 1008,-20

## Silkscreen, mask and mechanical layers (free items; w line width, h text height)
Top Overlay:
  circle w10: c984.25,-354.33 r7.07
  lines w8: 1744,-836 1776,-864
Bottom Overlay:
  circle w10: c1180,-408 r5.66
  text "WiFi Smart Plug" at 744,-376 h60
  text "John Donnal" at 700,-468 h50
Mechanical 1:
  lines w8: -3895,-3225 -3845,-3225
Outline:
  the board outline again, w8
Mechanical 29:
  text "Assembly Top" at 598.85,64.91 h60
Mechanical 30:
  circle w10: c1352.42,-357.84 r15.04
  lines w8: 1131.27,-473.18 1229.8,-473.18 1229.8,-346.9 1131.27,-346.9 1131.27,-473.18 ; 1297.79,-664.68 1653.05,-664.68 1653.05,-312.21 1297.79,-312.21 1297.79,-664.68
  text "Assembly Bottom" at 1431.11,29.35 h60
  text "Y1" at 1200.2,-424.57 h30
  text "U1" at 1489.3,-512.04 h30